# Altium PCB PCB.PcbDoc
Units mm, origin at the board's own origin, x right, y up, seen from the top; angles counter-clockwise.
Board outline 82.53 x 49.5 mm, 2 copper layers (Top Layer, Bottom Layer); 55 components, 40 nets, 211 pads, 119 vias.
Unrouted connection lines stored in the file: 2.
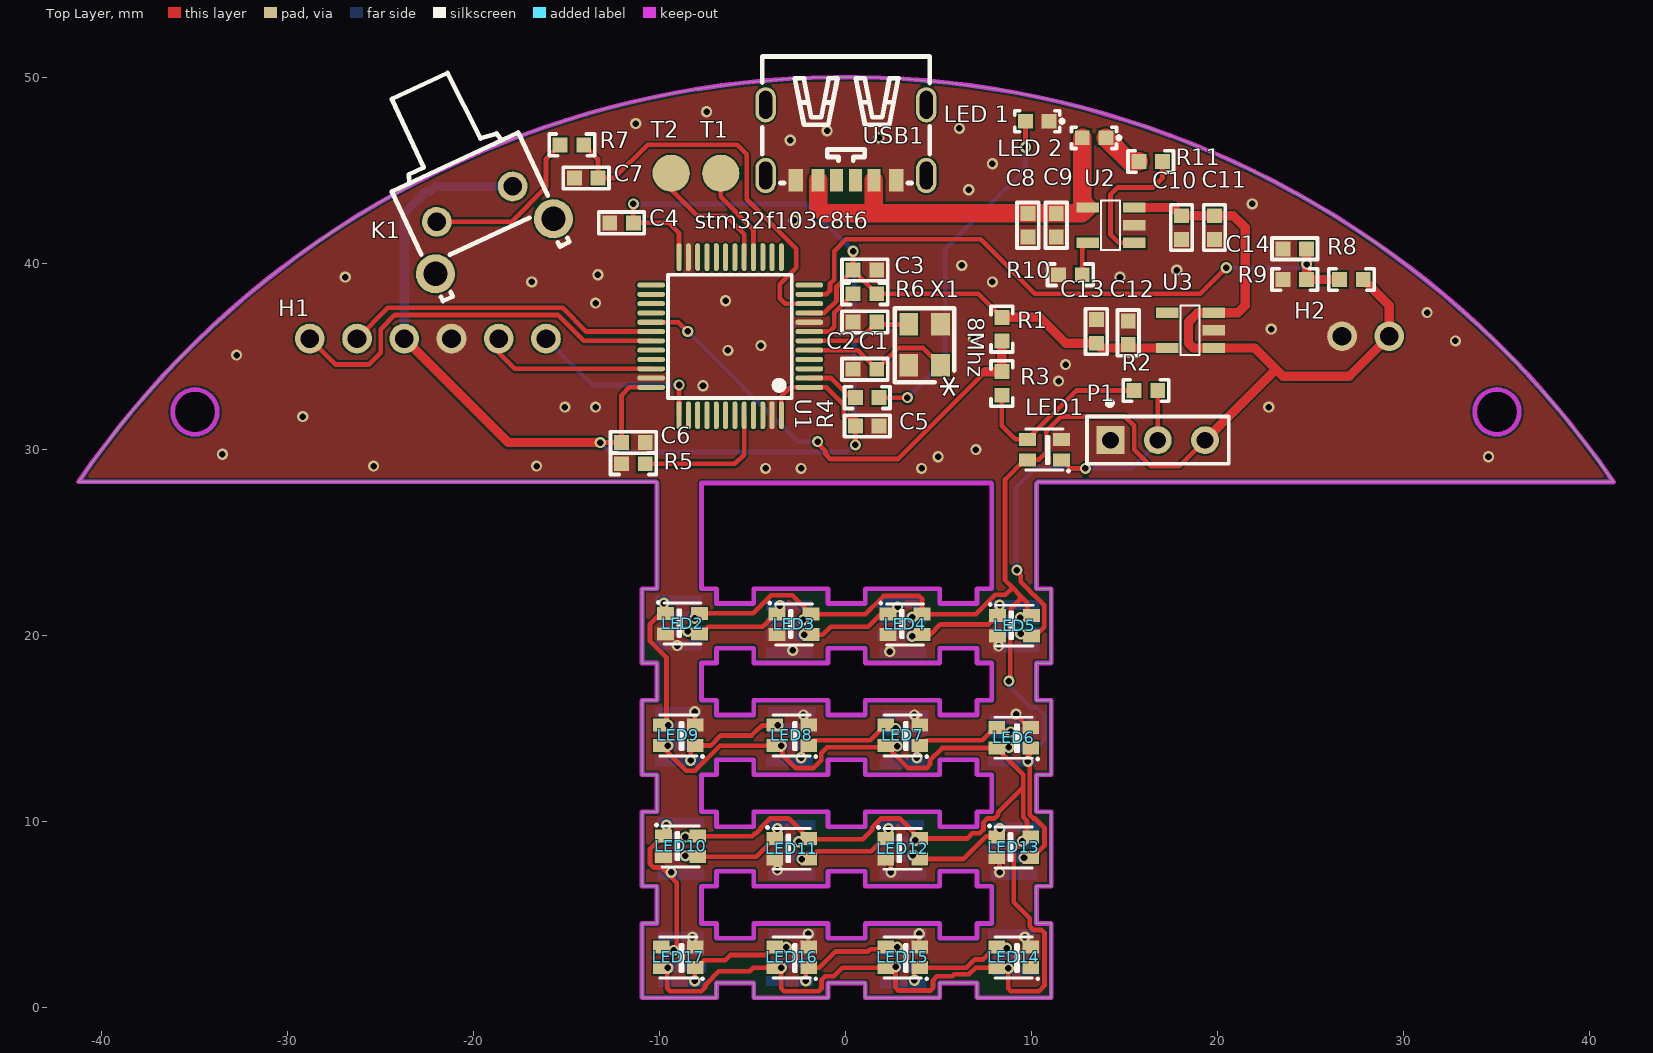
[diagram p0: Top Layer view]
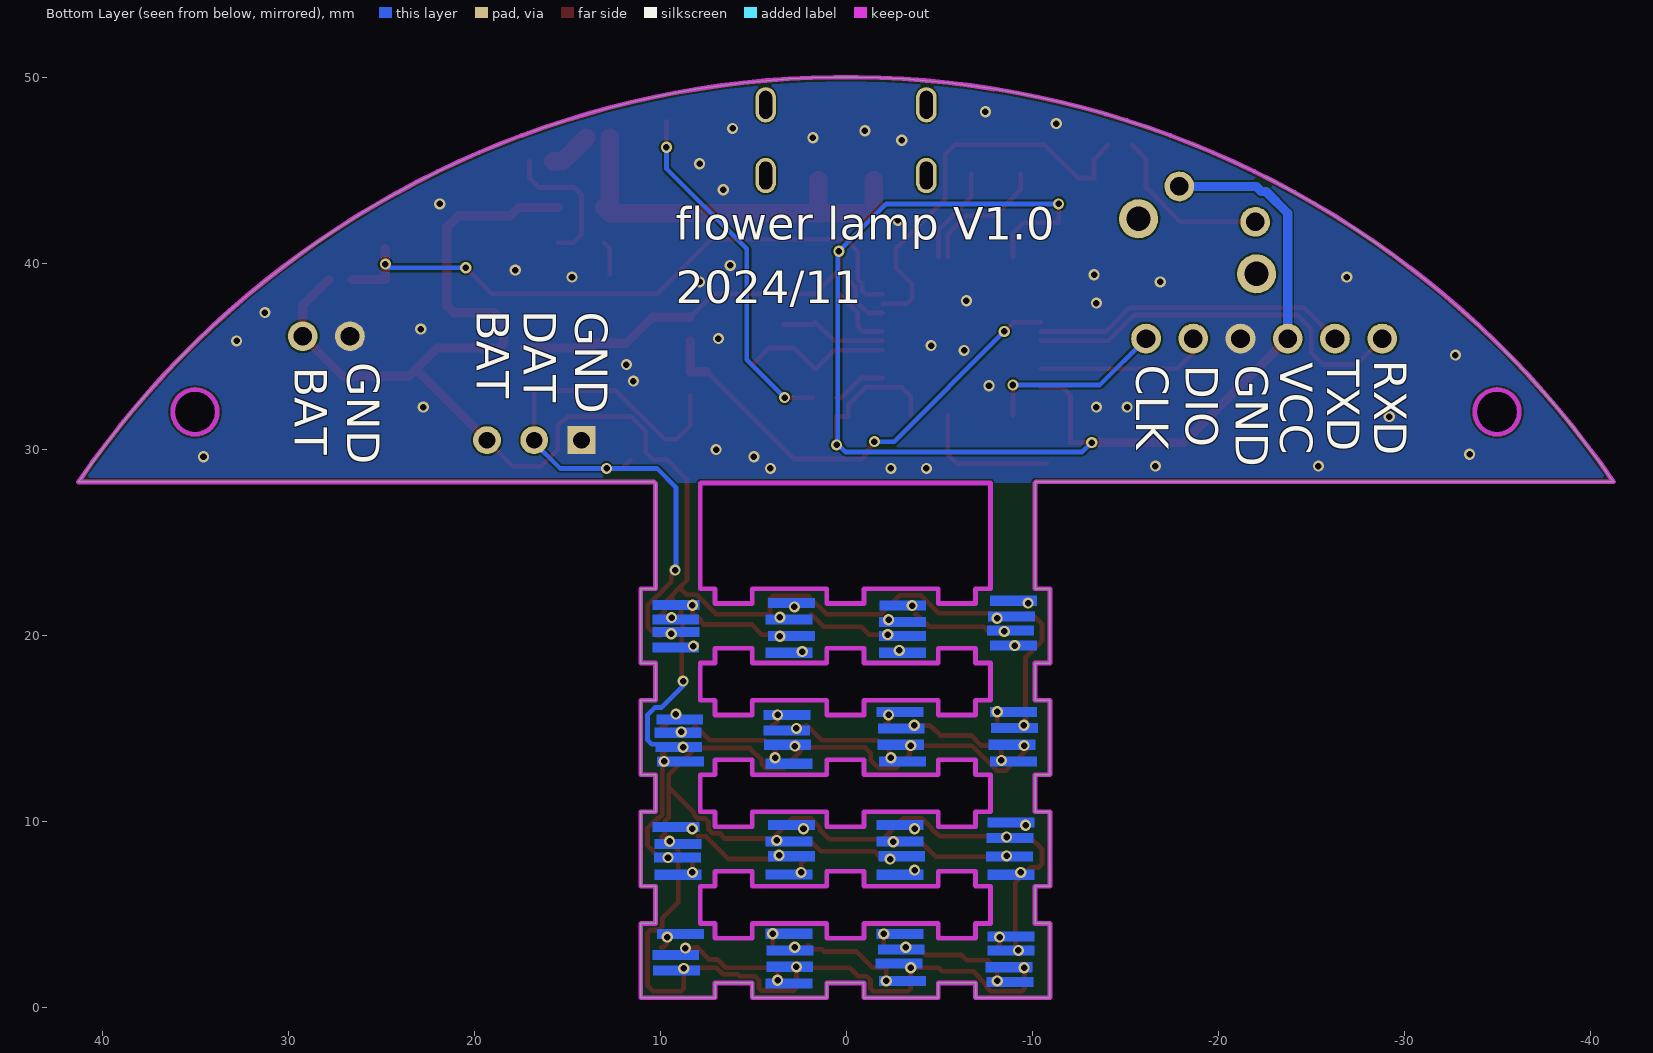
[diagram p1: Bottom Layer view, seen from below]

## Layer stack, top to bottom
Top Solder: solder mask 0.0102, Solder Resist, Dk 3.5
Top Layer: signal copper 0.0356
Dielectric 1: dielectric 0.32, FR-4, Dk 4.8
Bottom Layer: signal copper 0.0356
Bottom Solder: solder mask 0.0102, Solder Resist, Dk 3.5

## Board outline
-10.962,0.497 -10.962,4.497 -10.162,4.497 -10.162,6.497 -10.962,6.497 -10.962,10.497 -10.162,10.497 -10.162,12.497 -10.962,12.497 -10.962,16.497 -10.162,16.497 -10.162,18.497 -10.962,18.497 -10.962,22.497 -10.162,22.497 -10.162,28.192 -10.206,28.236 -41.264,28.236 cw(c0,0) 41.266,28.233 10.326,28.233 10.238,28.145 10.238,22.497 11.038,22.497 11.038,18.497 10.238,18.497 10.238,16.497 11.038,16.497 11.038,12.497 10.238,12.497 10.238,10.497 11.038,10.497 11.038,6.497 10.238,6.497 10.238,4.497 11.038,4.497 11.038,0.497 7.038,0.497 7.038,1.297 5.038,1.297 5.038,0.497 1.038,0.497 1.038,1.297 -0.962,1.297 -0.962,0.497 -4.962,0.497 -4.962,1.297 -6.962,1.297 -6.962,0.497
cut-out: 33.8,32 ccw(c35,32) 35,30.8 ccw(c35,32) 36.2,32 ccw(c35,32) 35,33.2 ccw(c35,32)
cut-out: -35,30.8 cw(c-35,32) -36.2,32 cw(c-35,32) -35,33.2 cw(c-35,32) -33.8,32 cw(c-35,32)
cut-out: -6.962,21.697 -4.962,21.697 -4.962,22.497 -0.962,22.497 -0.962,21.697 1.038,21.697 1.038,22.497 5.038,22.497 5.038,21.697 7.038,21.697 7.038,22.497 7.838,22.497 7.838,28.158 7.817,28.179 -7.762,28.179 -7.762,22.497 -6.962,22.497
cut-out: -7.762,4.497 -6.962,4.497 -6.962,3.697 -4.962,3.697 -4.962,4.497 -0.962,4.497 -0.962,3.697 1.038,3.697 1.038,4.497 5.038,4.497 5.038,3.697 7.038,3.697 7.038,4.497 7.838,4.497 7.838,6.497 7.038,6.497 7.038,7.297 5.038,7.297 5.038,6.497 1.038,6.497 1.038,7.297 -0.962,7.297 -0.962,6.497 -4.962,6.497 -4.962,7.297 -6.962,7.297 -6.962,6.497 -7.762,6.497
cut-out: -4.962,9.697 -4.962,10.497 -0.962,10.497 -0.962,9.697 1.038,9.697 1.038,10.497 5.038,10.497 5.038,9.697 7.038,9.697 7.038,10.497 7.838,10.497 7.838,12.497 7.038,12.497 7.038,13.297 5.038,13.297 5.038,12.497 1.038,12.497 1.038,13.297 -0.962,13.297 -0.962,12.497 -4.962,12.497 -4.962,13.297 -6.962,13.297 -6.962,12.497 -7.762,12.497 -7.762,10.497 -6.962,10.497 -6.962,9.697
cut-out: -7.762,16.497 -6.962,16.497 -6.962,15.697 -4.962,15.697 -4.962,16.497 -0.962,16.497 -0.962,15.697 1.038,15.697 1.038,16.497 5.038,16.497 5.038,15.697 7.038,15.697 7.038,16.497 7.838,16.497 7.838,18.497 7.038,18.497 7.038,19.297 5.038,19.297 5.038,18.497 1.038,18.497 1.038,19.297 -0.962,19.297 -0.962,18.497 -4.962,18.497 -4.962,19.297 -6.962,19.297 -6.962,18.497 -7.762,18.497

## Design rules (kind name [scope] priority, off if disabled: settings)
Clearance [All] p1: gap=0.1 ignorepadtopadclearanceinfootprint=FALSE except(0: Arc-Hole Track-Hole SMDPad-Hole THPad-Hole Via-Hole Fill-Hole Poly-Hole Region-Hole Text-Hole; 0.102: Arc-Arc Arc-Track Arc-SMDPad Arc-THPad Track-Track Track-SMDPad Track-THPad SMDPad-SMDPad SMDPad-THPad THPad-THPad; 0.127: Arc-Via Track-Via SMDPad-Via SMDPad-Text THPad-Via Via-Via; 0.254: Arc-Text Track-Text THPad-Text Via-Text Fill-Text Poly-Text Region-Text Text-Text)
DiffPairsRouting [All] p1: maxlimit=0.254 minlimit=0.15 mostfreqgap=0.254 toplayer_minwidth=0.2 toplayer_maxwidth=0.381 toplayer_prefwidth=0.25 bottomlayer_minwidth=0.2 bottomlayer_maxwidth=0.381 bottomlayer_prefwidth=0.25 maxuncoupledlength=12.7
HoleSize [All] p1: absolutevalues=TRUE maxlimit=30 minlimit=0.025 maxpercent=80.000 minpercent=20.000
HoleToHoleClearance [All] p1: gap=0.152 allowstackedmicrovias=TRUE
MinimumSolderMaskSliver [All] p1: minsoldermaskwidth=0
PlaneClearance [All] p1: clearance=0.254
PlaneConnect [All] p1: planeconnectstyle=Direct reliefexpansion=0.508 reliefentries=4 reliefconductorwidth=0.254 reliefairgap=0.254
PolygonConnect [All] p1: connectstyle=Direct reliefconductorwidth=0.254 reliefentries=4 polygonreliefangle="90 Angle" airgapwidth=0.254
RoutingVias [All] p1: holewidth=0.711 width=1.27 viastyle="Through Hole" minholewidth=0.3 minwidth=0.5 maxholewidth=30 maxwidth=30
SilkToSilkClearance [All] p1: silktosilkclearance=0
SilkToSolderMaskClearance [IsPad] p1: minsilkscreentomaskgap=0 clearancetoexposedcopper=TRUE
SolderMaskExpansion [All] p1: expansion=0.102 istentingtop=FALSE
Width [All] p1: maxlimit=3 minlimit=0.1 preferedwidth=0.254
22 further rules are at their usual default settings.

## Classes and differential pairs
component class Sheet1: C1 C2 C3 C4 C5 C6 C7 C8 C9 C10 C11 C12 C13 C14 H1 H2 K1 LED1 LED2 LED3 LED4 LED5 LED6 LED7 LED8 LED9 LED10 LED11 LED12 LED13 LED14 LED15 LED16 LED17 "LED 1" "LED 2" P1 R1 R3 R5 R7 R9 R11 T1 T2 U1 U2 U3 USB1 X1

## Components (designator, comment, footprint, x,y, rotation, side; value= is the part's Value field where it differs from the comment)
C1 "12pF" CC1608-0603 1.016,34.29 r0 top
C2 "12pF" CC1608-0603 1.016,36.83 r0 top
C3 "100NF" CC1608-0603 1.016,39.624 r180 top
C4 "100NF" CC1608-0603 -12.065,42.164 r0 top
C5 "100NF" CC1608-0603 1.143,31.242 r180 top
C6 "100NF" CC1608-0603 -11.43,30.353 r180 top
C7 "12pF" CC1608-0603 -13.97,44.577 r0 top
C8 "1UF" CC1608-0603 9.779,42.037 r90 top
C9 "100NF" CC1608-0603 11.303,42.037 r90 top
C10 "1UF" CC1608-0603 18.034,41.91 r90 top
C11 "100NF" CC1608-0603 19.812,41.91 r90 top
C12 "1UF" CC1608-0603 15.179,36.25 r270 top
C13 "100NF" CC1608-0603 13.462,36.322 r270 top
C14 "100PF" CC1608-0603 24.13,40.767 r0 top
H1 "Header_6P_Curved" Header_2_54_6PW -28.829,35.941 r0 top
H2 "Header_2P_Curved" Header_2_54_2PW 26.67,36.068 r0 top
K1 "SW-TH_4P_H" SW-TH_KH-6X6X7H-ZJ -19.431,42.037 r25 top locked
LED1 "WS2812B-2020" WS2812B-2020 10.668,29.972 r180 top
LED2 "WS2812B-2020" WS2812B-2020 -8.789,20.616 r0 top
LED3 "WS2812B-2020" WS2812B-2020 -2.794,20.574 r0 top
LED4 "WS2812B-2020" WS2812B-2020 3.175,20.574 r0 top
LED5 "WS2812B-2020" WS2812B-2020 9.061,20.507 r0 top
LED6 "WS2812B-2020" WS2812B-2020 9.017,14.478 r180 top
LED7 "WS2812B-2020" WS2812B-2020 3.048,14.605 r180 top
LED8 "WS2812B-2020" WS2812B-2020 -2.921,14.605 r180 top
LED9 "WS2812B-2020" WS2812B-2020 -9.017,14.605 r180 top
LED10 "WS2812B-2020" WS2812B-2020 -8.89,8.636 r0 top
LED11 "WS2812B-2020" WS2812B-2020 -2.921,8.509 r0 top
LED12 "WS2812B-2020" WS2812B-2020 3.048,8.509 r0 top
LED13 "WS2812B-2020" WS2812B-2020 9.017,8.585 r0 top
LED14 "WS2812B-2020" WS2812B-2020 9.017,2.667 r180 top
LED15 "WS2812B-2020" WS2812B-2020 3.048,2.667 r180 top
LED16 "WS2812B-2020" WS2812B-2020 -2.921,2.667 r180 top
LED17 "WS2812B-2020" WS2812B-2020 -9.017,2.667 r180 top
"LED 1" "LED 0603" "LED 0603" 10.287,47.625 r0 top
"LED 2" "LED 0603" "LED 0603" 13.335,46.736 r0 top
P1 "Header 3" HDR1X3 14.224,30.48 r0 top
R1 "10K" CR1608-0603 8.382,36.449 r270 top
R2 "0R" CR1608-0603 16.129,33.147 r0 top
R3 "0R" CR1608-0603 8.382,33.528 r270 top
R4 "1K" CR1608-0603 1.143,32.766 r180 top
R5 "10K" CR1608-0603 -11.43,29.21 r0 top
R6 "10K" CR1608-0603 1.016,38.354 r180 top
R7 "1K" CR1608-0603 -14.732,46.355 r180 top
R8 "10K" CR1608-0603 27.178,39.116 r0 top
R9 "10K" CR1608-0603 24.13,39.116 r0 top
R10 "2K" CR1608-0603 12.065,39.37 r0 top
R11 "2K" CR1608-0603 16.383,45.466 r180 top
T1 "test" test -6.731,44.831 r0 top
T2 "test" test -9.398,44.831 r0 top
U1 "STM32F103C8T6" LQFP-48 -6.223,36.068 r90 top locked
U2 "TP4054" SOT23-5 15.494,42.992 r270 top
U3 "RT9013-33GB" SOT23-5 19.772,37.338 r270 top
USB1 "TYPE_C_SMD_6P" TYPE-C-SMD_TYPE-C-6P 0,46.482 r180 top locked
X1 "3225_8M" XTAL-3225 3.38,34.503 r90 top

## Footprints (in the part's own frame and the unit in brackets; to place one, negate y for a bottom-side part, rotate by r counter-clockwise, add the part's x,y. Pads: shape width x height; smd on the part's side, far side on the other; paste and mask are expansions set on the pad)
CC1608-0603 [mm]
  rect 0.8x0.8 smd: 1(-0.635,0) 2(0.635,0)
  silkscreen extent -1.23,-0.58 1.23,0.58, body extent -0.8,-0.4 0.8,0.4, height 0.3
CR1608-0603 [mm]
  rect 0.8x0.8 smd: 1(-0.635,0) 2(0.635,0)
  silkscreen extent -1.23,-0.58 1.23,0.58, body extent -0.8,-0.4 0.8,0.4, height 0.45
HDR1X3 [mm] "Connector; Header; 3 Position"
  rect 1.5x1.5 hole 0.9: 1(0,0)
  round 1.5 hole 0.9: 2(2.54,0) 3(5.08,0)
  silkscreen extent -1.27,-1.27 6.35,2.14, body extent -1.27,-1.27 6.35,1.27, height 8.54
Header_2_54_2PW [mm] "弯的排针"
  round 1.6 hole 1: 1(0,0) 2(2.54,0)
  body extent -2.52,-7.47 5.18,0.38, height 5.8
Header_2_54_6PW [mm] "6P弯针"
  round 1.6 hole 1: 1(0,0) 2(2.54,0) 3(5.08,0) 4(7.62,0) 5(10.16,0) 6(12.7,0)
  body extent -2.56,-7.48 15.3,0.37, height 5.8
"LED 0603" [mm]
  rect 0.8x0.8 smd: 1(-0.635,0) 2(0.635,0)
  silkscreen extent -1.21,-0.57 1.4,0.57, body extent -0.8,-0.4 0.8,0.4, height 0.6
LQFP-48 [mm]
  oval 0.27x1.5 smd: 1(-2.75,-4.25) 2(-2.25,-4.25) 3(-1.75,-4.25) 4(-1.25,-4.25) 5(-0.75,-4.25) 6(-0.25,-4.25) 7(0.25,-4.25) 8(0.75,-4.25) 9(1.25,-4.25) 10(1.75,-4.25) 11(2.25,-4.25) 12(2.75,-4.25) 25(2.75,4.25) 26(2.25,4.25) 27(1.75,4.25) 28(1.25,4.25) 29(0.75,4.25) 30(0.25,4.25) 31(-0.25,4.25) 32(-0.75,4.25) 33(-1.25,4.25) 34(-1.75,4.25) 35(-2.25,4.25) 36(-2.75,4.25)
  oval 1.5x0.27 smd: 13(4.25,-2.75) 14(4.25,-2.25) 15(4.25,-1.75) 16(4.25,-1.25) 17(4.25,-0.75) 18(4.25,-0.25) 19(4.25,0.25) 20(4.25,0.75) 21(4.25,1.25) 22(4.25,1.75) 23(4.25,2.25) 24(4.25,2.75) 37(-4.25,2.75) 38(-4.25,2.25) 39(-4.25,1.75) 40(-4.25,1.25) 41(-4.25,0.75) 42(-4.25,0.25) 43(-4.25,-0.25) 44(-4.25,-0.75) 45(-4.25,-1.25) 46(-4.25,-1.75) 47(-4.25,-2.25) 48(-4.25,-2.75)
  silkscreen extent -3.33,-3.31 3.3,3.34, body extent -4.47,-4.54 4.53,4.46, height 1.56
SOT23-5 [mm] "适用于MIC5205"
  rect 0.55x1.2 smd: 1(1.905,0) 2(0.955,0) 3(0.005,0) 4(0.005,-2.5) 5(1.905,-2.5)
  silkscreen extent -0.38,-1.78 2.29,-0.76, body extent -0.6,-2.82 2.5,0.38, height 1.45
SW-TH_KH-6X6X7H-ZJ [mm]
  round 1.6 hole 1 paste+0 mask+0.05: 1(2.25,1.25) 2(-2.25,1.25)
  round 2.1 hole 1.3 paste+0 mask+0.05: 3(3.5,-1.25) 4(-3.5,-1.25)
  silkscreen extent -3.75,-2.75 3.75,8.25, body extent -3.75,-2.48 3.75,5.67, height 7.5
test [mm]
  round 2 smd: 0(0,0)
TYPE-C-SMD_TYPE-C-6P [mm]
  oval 1.1x1.9 hole 0.7 slot 1.5 at 90 deg paste+0 mask+0.051: 7(-4.32,-2.025) 7(-4.32,1.775) 7(4.32,-2.025) 7(4.32,1.775)
  rect 0.7x1.2 smd paste-100 mask+0.051: A5(-0.5,2.025) A9(1.5,2.025) B5(0.5,2.025) B9(-1.5,2.025)
  rect 0.8x1.2 smd paste-100 mask+0.051: A12(2.7,2.025) B12(-2.7,2.025)
  silkscreen extent -4.5,-4.63 4.5,2.18, body extent -4.44,-4.47 4.49,2.43, height 3.18
WS2812B-2020 [mm]
  rect 0.9x0.7 smd paste+0 mask+0.051: 1(-0.915,0.55) 2(-0.915,-0.55) 3(0.915,-0.55) 4(0.915,0.55)
  silkscreen extent -1.3,-1.1 1,1.15, body extent -1.1,-1 1.1,1, height 0.84
XTAL-3225 [mm]
  rect 1.2x1 smd: 1(0,-1.7) 2(2.2,-1.7) 3(2.2,0) 4(0,0)
  silkscreen extent -0.91,-2.44 3.07,0.76, body extent -0.43,-2.15 2.77,0.35, height 0.61

## Part data
C1 C2 C3 C4 C5 C6 C7 C8 C9 C10 C11 C12 C13 C14: library part "Cap Chip 0603", "0603封装的电容", Published=8-Jun-2000, Publisher="Altium Limited", Revision="July-2002: Re-released for DXP Platform."
H1: "弯的6P排针"
H2: "弯的2P排针"
K1: "卧式轻触开关"
LED1 LED2 LED3 LED4 LED5 LED6 LED7 LED8 LED9 LED10 LED11 LED12 LED13 LED14 LED15 LED16 LED17: JLCPCB Part Class="Extended Part", Manufacturer=worldsemi, Contributor=LCSC, Manufacturer Part=WS2812B-2020, spicePre=L, spiceSymbolName=WS2812B-2020, Supplier=LCSC, Supplier Part=C965555
P1: "Header, 3-Pin", LatestRevisionDate=17-Jul-2002, LatestRevisionNote="Re-released for DXP Platform.", Publisher="Altium Limited"
R1 R2 R3 R4 R5 R6 R7 R8 R9 R10 R11: library part "Resistor Chip 0603", "0603封装电阻", Published=8-Jun-2000, Publisher="Altium Limited", Revision="July-2002: Re-released for DXP Platform."
T1 T2: "测试点"
U1: JLCPCB Part Class="Basic Part", Manufacturer=ST(意法半导体), Manufacturer Part=STM32F103C8T6, spicePre=U, spiceSymbolName=STM32F103C8T6, Supplier=LCSC, Supplier Part=C8734, timeStamp=1455028086
U2: "迷你充电IC SOT-23-5"
U3: "LDO 2.2-5.2V IN 500Ma OUT SOT23-5"
USB1: JLCPCB Part Class="Extended Part", Manufacturer=null, Contributor=LCSC, Manufacturer Part=TYPE_C_SMD_6P, spicePre=U, spiceSymbolName=TYPE_C_SMD_6P, Supplier=LCSC, Supplier Part=C9900003080
X1: library part "XTAL 3225", "3225封装的晶振"

## Via types
v1: diameter 0.6, hole 0.35, Top Layer to Bottom Layer, tented both sides, 119 vias

## Nets (pads, with @x,y where several pads share a name; then routed paths per layer and width w, separated by ;. In a path a pad name is that pad's centre, name@x,y a point inside that pad or via, vN(x,y) a via of type N, cw(c..) or ccw(c..) an arc to the next point about the centre after c; other vN are vias at no path point)
5V: "LED 2.1" C8.2 C9.2 U2.4 USB1.A9 USB1.B9 | length 22
  Top Layer w1: USB1.A9 -1.5,43.029 -1.143,42.672 1.778,42.672 ; USB1.B9 1.5,42.95 1.778,42.672 ; 12.7,46.736 12.7,43.281 U2.4 12.679,42.672 C9.2 C8.2 1.778,42.672
ADCIN1: C14.2 R8.1 R9.2 U1.11 | length 34.4
  Top Layer w0.254: U1.11 -1.052,38.318 -0.864,38.506 -0.864,38.882 -0.635,39.111 -0.635,40.64 0,41.275 7.239,41.275 10.16,38.354 19.05,38.354 v1(20.447,39.751)
  Top Layer w0.5: C14.2 v1(24.765,39.941) R9.2 R8.1
  Bottom Layer w0.254: v1(20.447,39.751) 24.575,39.751 v1(24.765,39.941)
BAT: C10.2 C11.2 H2.2 LED1.4 LED2.4 LED3.4 LED4.4 LED5.4 LED6.4 LED7.4 LED8.4 LED9.4 LED10.4 LED11.4 LED12.4 LED13.4 LED14.4 LED15.4 LED16.4 LED17.4 P1.3 R8.2 U2.3 U3.1 U3.3 | length 178.7
  Top Layer w0.254: LED17.4 -9.832,2.117 -9.609,1.894 -9.609,1.001 -9.46,0.853 -7.783,0.853 -7.55,1.086 -7.55,1.211 -6.831,1.93 -5.176,1.93 -4.99,2.117 LED16.4 v1(-3.481,2.117) -3.481,1.001 -3.332,0.853 -1.466,0.853 -1.318,1.001 -1.318,1.444 -1.109,1.653 -0.666,1.653 -0.202,2.117 LED15.4 2.154,2.138 2.646,2.138 v1(2.667,2.159) 2.667,1.038 2.816,0.889 4.534,0.889 4.682,1.038 4.682,1.444 4.891,1.653 5.717,1.653 5.825,1.761 6.611,1.761 6.967,2.117 LED14.4 8.202,2.117 8.223,2.096 v1@8.699,2.096 ; LED9.4 -8.577,12.7 -8.128,12.7 -6.773,14.055 LED8.4 v1(-3.481,14.055) -3.415,13.989 -3.415,13.575 -2.693,12.853 -1.752,12.853 -1.327,13.278 -1.327,13.659 -1.016,13.97 2.048,13.97 LED7.4 ; LED10.4 -5.038,9.186 -4.883,9.341 -4.815,9.341 -4.606,9.55 -4.606,9.618 -4.083,10.141 -3.088,10.141 -1.964,9.017 0.905,9.017 1.331,9.443 1.394,9.505 cw(c1.739,9.505) 1.494,9.749 1.886,10.141 2.881,10.141 LED12.4 ; LED2.4 -4.99,21.166 -4.015,22.141 -2.896,22.141 LED3.4 1.043,21.124 2.017,22.098 3.941,22.098 4.09,21.949 LED4.4 6.989,21.124 8.026,22.161 8.572,22.161 8.954,22.543 ; v1(2.743,14.03) 2.731,14.042 2.245,14.042 2.456,13.832 2.456,13.732 3.335,12.853 4.344,12.853 4.513,13.022 4.513,13.275 5.166,13.928 LED6.4 ; v1(3.728,8.964) 3.868,8.964 LED12.4 ; v1(8.721,2.074) 8.721,1.001 8.869,0.853 10.378,0.853 10.668,1.143 10.668,3.993 10.519,4.141 10.091,4.141 9.882,4.35 9.882,4.778 9.017,5.644 9.017,8.414 9.482,8.879 v1(9.482,8.912) ; v1(8.763,13.97) 8.624,13.97 8.603,13.949 8.123,13.949 LED6.4 ; v1(8.763,17.526) 8.825,17.588 8.825,20.402 8.782,20.444 8.782,20.57 8.871,20.658 8.871,21.417 9.353,21.899 9.353,22.143 ; v1(9.379,20.936) 9.439,20.997 9.682,20.997 LED5.4@9.859,21.174 ; LED13.4@9.705,9.135 LED13.4@9.609,9.039 ; LED13.4@9.805,9.135 LED13.4 9.736,9.331 9.736,9.993 9.527,10.202 9.527,11.813 ; LED5.4 LED5.4@9.859,21.174 ; P1.3 17.907,29.083 16.383,29.083 15.494,29.972 15.494,31.242 14.986,31.75 11.557,31.75 10.768,30.961 10.768,29.818 10.372,29.422 LED1.4 9.61,29.422 8.549,28.361 8.549,22.947 8.954,22.543 ; LED12.4 6.519,9.059 6.801,9.341 7.185,9.341 7.394,9.55 7.394,9.934 7.601,10.141 7.985,10.141 8.194,10.35 8.194,10.48 9.527,11.813 ; LED6.4 9.527,12.503 9.527,11.813 ; 8.954,22.543 9.353,22.143 ; 9.353,22.143 9.753,21.743 9.753,21.28 LED5.4@9.859,21.174 ; v1(9.482,8.912) 9.609,8.912 LED13.4@9.609,9.039 ; v1(9.482,8.912) LED13.4@9.609,9.039
  Top Layer w0.5: U2.3 17.592,42.987 C10.2 C11.2 20.828,42.545 21.463,41.91 21.463,37.719 21.077,37.333 U3.3 18.918,37.333 18.415,36.83 18.415,35.687 18.669,35.433 U3.1 21.971,35.433 23.05,34.353 ; P1.3 23.05,34.227 23.05,34.353 ; R8.2 29.21,37.719 H2.2 27.051,33.909 23.495,33.909 23.05,34.353
  Bottom Layer w0.254: -8.898,20.995 -8.206,20.995 v1(-8.119,20.907) ; v1(2.743,14.03) 3.073,14.03 3.149,14.105 ; 3.199,8.959 3.204,8.964 v1(3.728,8.964) ; v1(8.763,17.526) 8.763,17.272 9.933,16.102 10.284,16.102 10.668,15.718 10.668,14.351 10.445,14.128 9.567,14.128 ; v1@9.136,20.907 9.35,20.907 v1(9.379,20.936)
  other v1: -9.577,2.117 -2.54,8.89 -8.636,9.144 -9.577,14.055 -2.286,20.828 3.556,20.955
BOOT0: R5.2 U1.44 | length 7.6
  Top Layer w0.254: R5.2 -5.969,29.21 -5.473,29.706 U1.44
DO: LED1.1 LED5.3 P1.2 R2.2 | length 22.1
  Top Layer w0.254: v1(9.191,23.495) 9.191,23.401 9.398,23.194 9.398,22.872 9.882,22.388 9.882,22.35 10.091,22.141 10.129,22.141 10.655,21.615 10.655,20.434 10.178,19.957 LED5.3 ; LED1.1 12.049,28.956 v1@12.827,28.956 ; P1.2 R2.2
  Bottom Layer w0.254: v1@9.144,23.495 9.144,27.94 10.16,28.956 v1(12.874,28.956) 15.367,28.956 16.764,30.353 P1.2 ; v1@9.259,20.223 9.398,20.085 v1(9.398,20.075)
GND: "LED 1.2" C1.1 C2.1 C3.1 C4.1 C5.1 C6.1 C7.1 C8.1 C9.1 C10.1 C11.1 C12.1 C13.1 C14.1 H1.4 H2.1 LED1.2 LED2.2 LED3.2 LED4.2 LED5.2 LED6.2 LED7.2 LED8.2 LED9.2 LED10.2 LED11.2 LED12.2 LED13.2 LED14.2 LED15.2 LED16.2 LED17.2 P1.1 R5.1 R9.1 R10.1 U1.8 U1.23 U1.35 U1.47 U2.2 U3.2 USB1.A12 USB1.B12 X1.2 X1.4 | length 7.8
  Top Layer w0.254: v1(-8.255,3.767) -8.255,3.37 LED17.2 ; v1(-8.128,15.875) -8.128,15.181 LED9.2 ; v1(-2.286,15.705) -2.286,15.378 -2.063,15.155 LED8.2 ; v1(-2.032,3.937) -2.032,3.243 LED16.2 ; LED12.2 2.19,7.959 2.413,7.736 v1(2.413,7.239) ; v1(3.683,15.705) 3.683,15.378 3.906,15.155 LED7.2 ; v1(3.937,3.943) 3.937,3.243 LED15.2 ; LED13.2 8.255,7.882 v1(8.255,7.239) ; v1(9.144,15.748) 9.144,15.716 9.832,15.028 LED6.2 ; v1(9.609,3.767) 9.609,3.44 9.832,3.217 LED14.2
  other v1: -3.683,7.366 2.35,19.114 -2.862,19.177 8.209,19.407 -9.069,19.431 -4.318,28.956 -2.413,28.956 4.064,28.956 -25.4,29.083 -16.637,29.083 4.953,29.591 34.544,29.591 -33.528,29.718 6.985,29.972 -29.21,31.75 -15.113,32.258 -13.462,32.258 22.733,32.258 -7.687,33.409 11.43,33.655 11.811,34.544 -32.766,35.052 -6.35,35.306 -4.572,35.56 32.766,35.814 6.858,35.941 22.86,36.449 31.242,37.338 -13.462,37.846 -6.477,37.973 -16.891,38.989 7.874,38.989 -26.924,39.243 14.732,39.243 -13.335,39.37 17.78,39.624 6.223,39.878 -2.794,42.291 21.844,43.18 6.604,43.942 7.874,45.339 -3,46.607 1.778,46.736 -1.016,47.117 6.096,47.244 -11.303,47.498 -7.493,48.133
LED0: R4.2 U1.2 | length 2.9
  Top Layer w0.254: U1.2 -0.798,33.818 0.254,32.766 R4.2
NetK1_2: K1.2 R7.2 | length 9.2
  Top Layer w0.254: K1.2 -17.979,42.219 -16.129,44.069 -16.129,45.593 R7.2
NetLED2_1: LED2.1 LED9.3 | length 7.7
  Top Layer w0.254: LED9.3 v1(-9.567,15.155) ; LED2.1 -9.949,21.166 -10.541,20.574 -10.541,19.685 -9.652,18.796 LED9.3@-9.652,15.24
  Bottom Layer w0.254: v1(-9.567,15.155) -9.417,15.005 -9.061,15.005
  other v1: -9.789,21.716
NetLED2_3: LED2.3 LED3.1 | length 4.6
  Top Layer w0.254: LED2.3 -7.774,20.066 -7.393,20.447 -4.486,20.447 -3.809,21.124 LED3.1
  other v1: -8.509,20.193 -3.556,21.587
NetLED3_3: LED3.3 LED4.1 | length 4.5
  Top Layer w0.254: LED3.3 -1.241,20.024 -0.818,20.447 1.202,20.447 LED4.1@1.879,21.124
  Bottom Layer w0.254: v1(2.778,21.516) 2.778,21.559 v1@2.936,21.717
  other v1: -2.244,20.024
NetLED4_3: LED4.3 LED5.1 | length 6.5
  Top Layer w0.254: LED4.3@3.709,20.024 4.53,20.024 5.08,20.574 7.663,20.574 7.823,20.734 7.823,20.834 8.046,21.057 LED5.1 8.255,21.166 v1(8.255,21.607)
  Bottom Layer w0.254: v1(8.255,21.607) 9.161,21.607 9.207,21.653
  other v1: 3.556,19.939
NetLED6_1: LED6.1 LED13.3 | length 7.3
  Top Layer w0.254: v1(9.571,8.035) LED13.3@9.807,8.035 ; v1(9.779,13.208) 9.779,13.361 9.779,13.775 LED6.1 ; v1@9.882,13.208 9.882,10.35 10.125,10.107 ; v1@9.882,13.361 LED6.1@9.882,13.775 ; LED13.3 10.032,8.035 10.668,8.671 10.668,9.633 10.16,10.141
NetLED6_3: LED6.3 LED7.1 | length 6.5
  Top Layer w0.254: v1(3.81,13.407) 3.81,13.832 3.835,13.857 3.865,13.857 4.359,14.351 7.325,14.351 8.002,15.028 8.192,15.028 8.361,14.859 8.791,14.859 v1(8.857,14.793) ; LED7.1@3.81,13.902 LED7.1
  Bottom Layer w0.254: v1(8.857,14.793) 8.901,14.749 v1@9.028,14.749
NetLED7_3: LED7.3 LED8.1 | length 6.1
  Top Layer w0.254: v1(-2.413,13.407) -2.413,13.5 -2.329,13.584 -2.329,13.832 -2.106,14.055 LED8.1 -1.71,14.351 1.306,14.351 2.11,15.155 LED7.3 2.236,15.052 2.601,15.052 v1(2.667,14.986)
NetLED8_3: LED8.3 LED9.1 | length 5.6
  Top Layer w0.254: v1(-8.353,13.259) -8.353,13.832 -8.13,14.055 LED9.1 -8.097,14.06 -7.271,14.06 -6.726,14.605 -5.08,14.605 -4.699,14.986 -4.667,14.986 -4.518,15.135 -3.856,15.135 LED8.3
  other v1: -3.671,15.155
NetLED10_1: LED10.1 LED17.3 | length 8.1
  Top Layer w0.254: LED17.3 -9.829,3.114 -9.337,3.114 v1(-9.271,3.048) -9.271,3.142 -9.101,3.312 -9.101,6.688 -9.92,7.507 -10.35,7.507 -10.541,7.699 -10.541,8.473 -9.828,9.186 LED10.1
  other v1: -9.398,7.239 -9.652,9.779
NetLED10_3: LED10.3 LED11.1 | length 4.5
  Top Layer w0.254: LED10.3 -4.832,8.086 -3.859,9.059 LED11.1
  other v1: -8.636,8.128 -3.683,9.587
NetLED11_3: LED11.3 LED12.1 | length 4.6
  Top Layer w0.254: LED11.3 -1.906,7.959 -1.683,8.182 -1.683,8.233 -1.534,8.382 1.356,8.382 2.033,9.059 LED12.1
  other v1: -2.371,7.959 2.286,9.587
NetLED12_3: LED12.3 LED13.1 | length 4.5
  Top Layer w0.254: LED12.3 6.306,7.959 7.533,9.186 LED13.1@7.975,9.186
  other v1: 3.598,8.159 8.263,9.588
NetLED14_3: LED14.3 LED15.1 | length 6
  Top Layer w0.254: v1(3.675,1.443) 3.675,1.929 3.863,2.117 6.464,2.117 6.902,2.555 7.341,2.555 8.002,3.217 LED14.3 8.123,3.196 8.615,3.196 v1(8.636,3.175)
NetLED15_3: LED15.3 LED16.1 | length 6.2
  Top Layer w0.254: v1(-2.159,1.407) -2.159,2.021 -2.063,2.117 -1.439,2.117 -0.57,2.986 1.175,2.986 1.302,3.113 1.81,3.113 LED15.3@2.014,3.317 ; LED15.3 2.032,3.318 2.137,3.213 2.139,3.215 2.754,3.215 v1(2.756,3.213)
NetLED16_3: LED16.3 LED17.1 | length 6.1
  Top Layer w0.254: v1(-8.128,1.407) LED17.1@-8.128,2.091 ; LED17.1 LED17.1@-8.128,2.091 ; v1(-3.214,3.214) v1(-3.214,3.214) -3.835,3.216 LED16.3 -3.936,3.217 -4.159,2.994 -4.159,2.943 -4.308,2.794 -6.223,2.794 -6.5,2.517 -7.63,2.517 -7.779,2.369 -7.779,2.34 -8.028,2.091 LED17.1@-8.128,2.091
"NetLED 1_1": "LED 1.1" R4.1 | length 19
  Top Layer w0.254: R4.1 v1(3.302,32.766) ; v1(9.652,46.228) 9.652,47.625
  Bottom Layer w0.254: v1(3.302,32.766) 5.334,34.798 5.334,40.767 9.652,45.085 v1(9.652,46.228)
"NetLED 2_2": "LED 2.2" R11.2 | length 2.3
  Top Layer w1: 13.97,46.736 15.24,45.466 R11.2
NetR10_2: R10.2 U2.5 | length 1.8
  Top Layer w0.254: R10.2 12.7,40.793 U2.5
NetR11_1: R11.1 U2.1 | length 7.7
  Top Layer w0.254: U2.1 14.666,41.087 14.224,41.529 14.224,43.688 14.605,44.069 16.51,44.069 17.018,44.577 R11.1
NetT1_0: T1.0 U1.16 | length 5.2
  Top Layer w0.254: T1.0 -6.731,43.561 -4.973,41.803 U1.16
NetT2_0: T2.0 U1.17 | length 7
  Top Layer w0.254: T2.0 -9.398,43.942 -8.001,42.545 -6.477,42.545 -5.473,41.541 U1.17
NRST: R6.2 U1.7 | length 3.6
  Top Layer w0.254: U1.7 -0.893,36.318 -0.635,36.576 -0.635,37.338 R6.2
RCC_IN: C1.2 U1.5 X1.1 | length 8.3
  Top Layer w0.254: U1.5 0.623,35.318 C1.2 2.794,35.433 4.15,35.433 X1.1
RCC_OUT: C2.2 U1.6 X1.3 | length 5.8
  Top Layer w0.254: U1.6 0.639,35.818 C2.2 1.778,36.703 X1.3
RXD: H1.1 U1.31 | length 21.4
  Top Layer w0.254: H1.1 -27.432,34.544 -25.654,34.544 -25.019,35.179 -25.019,36.449 -24.257,37.211 -15.489,37.211 -14.096,35.818 U1.31
SWCLK: H1.6 U1.37 | length 9.8
  Top Layer w0.254: U1.37 v1(-8.973,33.445)
  Bottom Layer w0.254: H1.6 -13.633,33.445 v1(-8.973,33.445)
SWDIO: H1.5 U1.34 | length 9.3
  Top Layer w0.254: H1.5 -18.669,35.179 -17.808,34.318 U1.34
SYS_WKUP0: C7.2 R7.1 U1.10 | length 22
  Top Layer w0.254: R7.1 -13.335,45.593 C7.2 -12.446,44.577 -10.668,46.355 -5.842,46.355 -5.334,45.847 -5.334,43.434 -2.667,40.767 -2.667,39.751 -3.556,38.862 -3.556,38.1 -3.274,37.818 U1.10
TIM1CH1: R1.2 R3.1 U1.29 | length 25.6
  Top Layer w0.254: U1.29 -9.005,36.818 v1(-8.509,36.322) ; v1(-1.524,30.399) -1.524,30.305 -1.099,29.88 -1.099,29.72 -0.843,29.464 2.794,29.464 7.493,34.163
  Top Layer w0.5: 7.493,34.163 R3.1 R1.2
  Bottom Layer w0.254: v1(-8.509,36.322) -2.586,30.399 v1(-1.524,30.399)
TXD: H1.2 U1.30 | length 17
  Top Layer w0.254: H1.2 -24.638,37.592 -15.24,37.592 -13.966,36.318 U1.30
VCC: C3.2 C4.2 C5.2 C6.2 C12.2 C13.2 H1.3 K1.1 R1.1 R6.1 U1.1 U1.9 U1.24 U1.36 U1.48 U3.5 | length 105
  Top Layer w0.254: v1(-13.208,30.353) C6.2 -12.065,32.893 -11.64,33.318 U1.36 ; v1(-11.43,43.18) C4.2 -9.525,42.164 -8.973,41.612 U1.24 ; U1.48 -3.473,32.849 -3.004,33.318 U1.1 -1.06,33.318 -0.121,32.379 -0.121,31.75 0.508,31.75 v1(0.508,30.226) ; U1.9 -1.163,37.318 -0.508,37.973 -0.508,38.735 C3.2 ; v1(0.381,40.64) C3.2 ; R1.1 7.112,38.354 R6.1 C3.2
  Top Layer w0.5: H1.3 -18.161,30.353 v1(-13.208,30.353) ; R1.1 10.414,37.084 11.811,35.687 C13.2 13.716,35.433 U3.5
  Bottom Layer w0.254: v1(-13.208,30.353) -12.7,29.845 0.033,29.845 0.414,30.226 v1(0.508,30.226) 0.445,30.29 0.445,40.576 -2.159,43.18 v1(-11.43,43.18)
  Bottom Layer w0.5: H1.3 -23.749,42.672 -22.574,43.847 -22.322,43.847 -22.048,44.121 K1.1
WS2812: LED1.3 R2.1 R3.2 | length 10.1
  Top Layer w0.254: R3.2 8.382,31.242 9.102,30.522 LED1.3 12.378,33.147 R2.1
pads on no net: K1.3 K1.4 LED14.1 U1.3 U1.4 U1.12 U1.13 U1.14 U1.15 U1.18 U1.19 U1.20 U1.21 U1.22 U1.25 U1.26 U1.27 U1.28 U1.32 U1.33 U1.38 U1.39 U1.40 U1.41 U1.42 U1.43 U1.45 U1.46 U3.4 USB1.7 USB1.A5 USB1.B5

## Polygon pours and split planes (outlines as drawn)
no net on Bottom Solder "NONET_L-01_P-001" (solid): 7.366,4.318 10.668,4.318 10.668,1.143 7.493,1.143
no net on Bottom Solder "NONET_L-01_P-001" (solid): 1.397,4.191 4.699,4.191 4.699,1.054 4.534,0.889 1.524,0.889
no net on Bottom Solder "NONET_L-01_P-001" (solid): -4.572,4.191 -1.397,4.191 -1.392,4.186 -1.392,0.927 -4.356,0.927 -4.445,1.016
no net on Bottom Solder "NONET_L-01_P-001" (solid): -10.668,4.064 -7.239,4.064 -7.239,1.016 -7.366,0.889 -10.541,0.889
no net on Bottom Solder "NONET_L-01_P-001" (solid): 7.366,10.16 10.541,10.16 10.668,10.033 10.668,6.858 7.493,6.858
no net on Bottom Solder "NONET_L-01_P-001" (solid): 1.397,10.287 4.699,10.287 4.699,6.858 4.572,6.731 1.397,6.731
no net on Bottom Solder "NONET_L-01_P-001" (solid): -4.572,10.16 -1.27,10.16 -1.27,6.731 -4.572,6.731
no net on Bottom Solder "NONET_L-01_P-001" (solid): -10.668,10.16 -7.366,10.16 -7.366,6.858 -7.493,6.731 -10.541,6.731
no net on Bottom Solder "NONET_L-01_P-001" (solid): -10.541,16.256 -7.239,16.256 -7.239,12.827 -10.541,12.827
no net on Bottom Solder "NONET_L-01_P-001" (solid): -4.572,16.256 -1.397,16.256 -1.397,12.7 -4.445,12.7
no net on Bottom Solder "NONET_L-01_P-001" (solid): 1.524,16.129 4.572,16.129 4.572,12.827 1.524,12.827
no net on Bottom Solder "NONET_L-01_P-001" (solid): 7.493,15.875 10.057,15.875 10.317,15.615 10.317,12.924 10.414,12.827 10.287,12.7 7.493,12.7
no net on Bottom Solder "NONET_L-01_P-001" (solid): 7.366,22.098 10.795,22.098 10.795,18.923 10.668,18.796 7.366,18.796
no net on Bottom Solder "NONET_L-01_P-001" (solid): 1.397,22.225 4.699,22.225 4.699,18.796 1.27,18.796
no net on Bottom Solder "NONET_L-01_P-001" (solid): -4.572,22.098 -1.27,22.098 -1.27,18.796 -4.572,18.796
no net on Bottom Solder "NONET_L-01_P-001" (solid): -10.541,22.098 -7.366,22.098 -7.366,18.923 -10.541,18.923
GND on Bottom Layer "GND_L02_P002" (solid, remove dead copper, pour order 2): -10.162,28.192 -10.206,28.236 -41.264,28.236 cw(c0,0) 41.266,28.233 10.326,28.233 10.285,28.192
GND on Top Layer "GND_L01_P003" (solid, pour order 3): -10.962,0.497 -10.962,4.497 -10.162,4.497 -10.162,6.497 -10.962,6.497 -10.962,10.497 -10.162,10.497 -10.162,12.497 -10.962,12.497 -10.962,16.497 -10.162,16.497 -10.162,18.497 -10.962,18.497 -10.962,22.497 -10.162,22.497 -10.162,28.192 -10.206,28.236 -41.264,28.236 cw(c0,0) 41.266,28.233 10.326,28.233 10.238,28.145 10.238,22.497 11.038,22.497 11.038,18.497 10.238,18.497 10.238,16.497 11.038,16.497 11.038,12.497 10.238,12.497 10.238,10.497 11.038,10.497 11.038,6.497 10.238,6.497 10.238,4.497 11.038,4.497 11.038,0.497 7.038,0.497 7.038,1.297 5.038,1.297 5.038,0.497 1.038,0.497 1.038,1.297 -0.962,1.297 -0.962,0.497 -4.962,0.497 -4.962,1.297 -6.962,1.297 -6.962,0.497

## Keep-outs
Keep-Out Layer:
  circle w0.254: c35,32 r1.2
  circle w0.254: c-35,32 r1.2
  lines w0.254: -10.206,28.236 -41.264,28.236 cw(c0,0) 41.266,28.233 10.326,28.233 ; -10.162,28.192 -10.162,22.497 -10.962,22.497 -10.962,21.697 -10.962,19.297 -10.962,18.497 -10.162,18.497 -10.162,16.497 -10.962,16.497 -10.962,15.697 -10.962,13.297 -10.962,12.497 -10.162,12.497 -10.162,10.497 -10.962,10.497 -10.962,6.497 -10.162,6.497 -10.162,4.497 -10.962,4.497 -10.962,0.497 -10.162,0.497 -7.762,0.497 -6.962,0.497 -6.962,1.297 -4.962,1.297 -4.962,0.497 -0.962,0.497 -0.962,1.297 1.038,1.297 1.038,0.497 5.038,0.497 5.038,1.297 7.038,1.297 7.038,0.497 11.038,0.497 11.038,1.297 11.038,3.697 11.038,4.497 10.238,4.497 10.238,6.497 11.038,6.497 11.038,7.297 11.038,9.697 11.038,10.497 10.238,10.497 10.238,12.497 11.038,12.497 11.038,13.297 11.038,15.697 11.038,16.497 10.238,16.497 10.238,18.497 11.038,18.497 11.038,19.297 11.038,21.697 11.038,22.497 10.238,22.497 10.238,28.145 ; 7.817,28.179 -7.762,28.179 -7.762,22.497 -6.962,22.497 -6.962,21.697 -4.962,21.697 -4.962,22.497 -0.962,22.497 -0.962,21.697 1.038,21.697 1.038,22.497 5.038,22.497 5.038,21.697 7.038,21.697 7.038,22.497 7.838,22.497 7.838,28.158 ; -7.762,4.497 -7.762,6.497 -6.962,6.497 -6.962,7.297 -4.962,7.297 -4.962,6.497 -0.962,6.497 -0.962,7.297 1.038,7.297 1.038,6.497 5.038,6.497 5.038,7.297 7.038,7.297 7.038,6.497 7.838,6.497 7.838,4.497 7.038,4.497 7.038,3.697 5.038,3.697 5.038,4.497 1.038,4.497 1.038,3.697 -0.962,3.697 -0.962,4.497 -4.962,4.497 -4.962,3.697 -6.962,3.697 -6.962,4.497 -7.762,4.497 ; -7.762,10.497 -7.762,12.497 -6.962,12.497 -6.962,13.297 -4.962,13.297 -4.962,12.497 -0.962,12.497 -0.962,13.297 1.038,13.297 1.038,12.497 5.038,12.497 5.038,13.297 7.038,13.297 7.038,12.497 7.838,12.497 7.838,10.497 7.038,10.497 7.038,9.697 5.038,9.697 5.038,10.497 1.038,10.497 1.038,9.697 -0.962,9.697 -0.962,10.497 -4.962,10.497 -4.962,9.697 -6.962,9.697 -6.962,10.497 -7.762,10.497 ; -7.762,16.497 -6.962,16.497 -6.962,15.697 -4.962,15.697 -4.962,16.497 -0.962,16.497 -0.962,15.697 1.038,15.697 1.038,16.497 5.038,16.497 5.038,15.697 7.038,15.697 7.038,16.497 7.838,16.497 7.838,18.497 7.038,18.497 7.038,19.297 5.038,19.297 5.038,18.497 1.038,18.497 1.038,19.297 -0.962,19.297 -0.962,18.497 -4.962,18.497 -4.962,19.297 -6.962,19.297 -6.962,18.497 -7.762,18.497 -7.762,16.497

## Other copper
Bottom Layer:
  rectangle net BAT: 7.859,1.696 10.377,2.238
  rectangle net NetLED14_3: 7.9,2.523 10.418,3.065
  rectangle net GND: 7.646,3.666 10.164,4.208
  rectangle net NetLED14_3: 1.804,0.999 4.322,1.541
  rectangle net BAT: 1.765,1.896 4.283,2.438
  rectangle net NetLED15_3: 1.745,2.776 4.263,3.318
  rectangle net GND: 1.804,3.672 4.322,4.214
  rectangle net NetLED15_3: -4.292,1.136 -1.774,1.678
  rectangle net BAT: -4.104,2.071 -1.586,2.613
  rectangle net NetLED16_3: -4.224,2.816 -1.706,3.358
  rectangle net GND: -4.165,3.666 -1.647,4.208
  rectangle net NetLED16_3: -10.068,1.086 -7.55,1.628
  rectangle net BAT: -10.025,1.871 -7.507,2.413
  rectangle net GND: -10.138,3.522 -7.62,4.064
  rectangle net NetLED10_1: -10.134,2.777 -7.616,3.319
  rectangle net NetLED10_1: -10.134,6.841 -7.616,7.383
  rectangle net NetLED10_3: -10.048,7.815 -7.53,8.357
  rectangle net BAT: -10.073,8.815 -7.555,9.357
  rectangle net NetLED10_1: -10.138,9.652 -7.62,10.194
  rectangle net NetLED10_3: -4.165,9.508 -1.647,10.05
  rectangle net BAT: -4.169,8.636 -1.651,9.178
  rectangle net NetLED11_3: -4.254,7.838 -1.736,8.38
  rectangle net GND: -4.165,6.841 -1.647,7.383
  rectangle net GND: 1.8,6.858 4.318,7.4
  rectangle net NetLED12_3: 1.665,7.838 4.183,8.38
  rectangle net BAT: 1.8,8.636 4.318,9.178
  rectangle net NetLED11_3: 1.673,9.525 4.191,10.067
  rectangle net GND: 7.773,6.841 10.291,7.383
  rectangle net NetLED6_1: 7.799,7.764 10.317,8.307
  rectangle net BAT: 7.773,8.492 10.291,9.034
  rectangle net NetLED12_3: 7.884,9.414 10.402,9.957
  rectangle net NetLED6_1: 7.646,12.937 10.164,13.479
  rectangle net BAT: 7.734,13.707 10.252,14.249
  rectangle net NetLED6_3: 7.769,14.478 10.287,15.02
  rectangle net GND: 7.679,15.193 10.197,15.735
  rectangle net NetLED6_3: 1.804,12.81 4.322,13.352
  rectangle net BAT: 1.89,13.834 4.408,14.376
  rectangle net NetLED7_3: 1.931,14.588 4.449,15.13
  rectangle net GND: 1.915,15.434 4.433,15.976
  rectangle net NetLED7_3: -4.292,12.937 -1.774,13.479
  rectangle net BAT: -4.204,13.834 -1.686,14.376
  rectangle net NetLED8_3: -4.224,14.714 -1.706,15.256
  rectangle net GND: -4.165,15.604 -1.647,16.146
  rectangle net NetLED8_3: -10.261,12.937 -7.743,13.479
  rectangle net BAT: -10.175,13.834 -7.657,14.376
  rectangle net NetLED2_1: -10.32,14.734 -7.802,15.276
  rectangle net GND: -10.261,15.604 -7.743,16.146
  rectangle net GND: -10.261,19.16 -7.743,19.702
  rectangle net NetLED2_3: -10.105,19.965 -7.587,20.507
  rectangle net BAT: -10.157,20.724 -7.639,21.266
  rectangle net NetLED2_1: -10.261,21.573 -7.743,22.115
  rectangle net NetLED2_3: -4.312,21.324 -1.794,21.866
  rectangle net BAT: -4.292,20.43 -1.774,20.972
  rectangle net NetLED3_3: -4.292,19.668 -1.774,20.21
  rectangle net GND: -4.292,18.779 -1.774,19.321
  rectangle net BAT: 1.8,20.574 4.318,21.116
  rectangle net NetLED4_3: 1.677,19.668 4.195,20.21
  rectangle net GND: 1.804,18.779 4.322,19.321
  rectangle net NetLED3_3: 1.677,21.446 4.195,21.988
  rectangle net GND: 7.896,19.05 10.414,19.592
  rectangle net DO: 7.874,19.886 10.392,20.428
  rectangle net BAT: 7.896,20.574 10.414,21.116
  rectangle net NetLED4_3: 7.874,21.336 10.392,21.878

## Silkscreen, mask and mechanical layers (free items; w line width, h text height)
Top Overlay:
  text "stm32f103c8t6" at -8.128,41.546 h1.52
  text "8Mhz" at 6.239,37.084 h1.52 r270
Bottom Overlay:
  text "flower lamp V1.0" at 9.144,40.665 h3
  text "DAT" at 17.907,37.465 h3 r90
  text "BAT" at 20.447,37.465 h3 r90
  text "GND" at 15.154,37.383 h3 r90
  text "2024/11" at 9.146,37.244 h3
  text "RXD" at -27.813,34.798 h3 r90
  text "TXD" at -25.273,34.798 h3 r90
  text "VCC" at -22.764,34.669 h3 r90
  text "GND" at 27.401,34.671 h3 r90
  text "GND" at -20.351,34.544 h3 r90
  text "DIO" at -17.684,34.544 h3 r90
  text "CLK" at -15.017,34.544 h3 r90
  text "BAT" at 30.226,34.417 h3 r90
Mechanical 1:
  lines w0.254: 0,28.236 0,50.038

## Text inside footprints (layer, text, board x,y; h text height)
X1: Top Overlay "*" at 7.366,32.766 h3 r90